# EAGLE board 001 (EAGLE 9.6.2)

Size 100 x 80 mm. Coordinates in mm from the lower left corner, seen from the top.
Outline: 0,0 100,0 100,80 0,80 0,0
Copper layers (1*16): Top 0.035mm / dielectric 1.5mm / Bottom 0.035mm
Design rules "default": minimum track width 6mil, minimum drill 0.35mm, track to track 6mil, track to pad 6mil, pad to pad 6mil, via to via 6mil, smd to smd 6mil, copper to edge 40mil, drill to drill 6mil, minimum pad ring 10mil, minimum via ring 8mil, stop-mask expansion 4mil, vias tented up to drill 0mil, thermal gap 10mil

## Footprints (pad centres in the part's own frame; a part is rotated, then mirrored left to right if it is on the bottom)
E7,5-16 = drill 1.016 pad 3.15: + -3.81,0 | drill 1.016 pad 3.15 octagon: - 3.81,0
DO-41 = drill 1: A 4.325,0 | drill 1 square: C -4.325,0
0207/5V = drill 0.813 octagon: 1 -2.54,0; 2 2.54,0
B02B-XH = drill 0.8 square: P$1 -2.54,0 | drill 0.8: P$2 0,0
08-043X78_VARI = drill 1.016 octagon: 1 -3.81,0; 2 3.81,0
05-043X78 = drill 1.016 octagon: 1 -2.54,0; 2 2.54,0
JQC-3FF = drill 1.3 pad 2.54: P$1 15.6,14; P$2 15.6,2; P$3 3.4,14; P$4 3.4,2; P$5 1.4,8
TOSHIBA_TLP222A_F_0 = drill 0.85 pad 1.35 square: 1 -3.81,1.27 | drill 0.85 pad 1.35: 2 -3.81,-1.27; 3 3.81,-1.27; 4 3.81,1.27
0446200002 = drill 0.889 pad 1.422: 1 3.556,2.54; 2 2.54,4.318; 3 1.524,2.54; 4 0.508,4.318; 5 -0.508,2.54; 6 -1.524,4.318; 7 -2.54,2.54; 8 -3.556,4.318 | drill 1.575 pad 2.286: S@1 -8.103,3.429; S@2 8.103,3.429 | hole 3.251: 6.35,0; -6.35,0

## Placement (x,y rotation side)
C1  35V/2200uF  [E7,5-16]  -95.25,-31.75 0 top  (outside the outline)
D1  1N4007  [DO-41]  -97.79,-44.45 0 top  (outside the outline)
R1  4.7k  [0207/5V]  -109.22,-50.8 0 top  (outside the outline)
U$1  02-JST-A  [B02B-XH]  33.02,38.1 270 top
U$2  02-JST-A  [B02B-XH]  -48.26,5.08 0 top  (outside the outline)
U$3  02-JST-A  [B02B-XH]  -58.42,5.08 0 top  (outside the outline)
U$4  TNR10V471K  [08-043X78_VARI]  -55.88,-5.08 0 top  (outside the outline)
U$5  LVR040  [05-043X78]  11.43,27.94 180 top
U$6  TNR10V471K  [08-043X78_VARI]  22.86,27.94 0 top
U$7  LVR040  [05-043X78]  -55.88,-12.7 0 top  (outside the outline)
U$8  [JQC-3FF]  7.62,31.75 0 top
U$9  [JQC-3FF]  -102.87,-11.43 0 top  (outside the outline)
U$10  [TOSHIBA_TLP222A_F_0]  -97.79,-20.32 0 top  (outside the outline)
U$11  02-JST-A  [B02B-XH]  -109.22,-43.18 0 top  (outside the outline)
X1  0446200002  [0446200002]  10.16,15.24 90 top
X2  0446200002  [0446200002]  40.64,15.24 90 top
X3  0446200002  [0446200002]  -22.86,40.64 0 top  (outside the outline)
X4  0446200002  [0446200002]  -22.86,58.42 0 top  (outside the outline)

## Library data of the parts
C1 = rcl; SPICEPREFIX: C
D1 = Diodes; CREATED_BY: PCBLayout.com; DIGIKEY_PART_NUMBER: 1N4007MSCT-ND; MANUFACTURER: Micro Commercial Co; MPN: 1N4007; PACKAGE: DO-41
R1 = rcl; SPICEPREFIX: R
U$1-U$9 U$11 = holly
U$10 = Toshiba-TLP222AF
X1-X4 = con-molex; MF: MOLEX; MPN: 0446200002; OC_FARNELL: 9251910

## Nets
GND: X2.S@1 X2.S@2
N$1: U$5.2 U$8.P$5
N$2: U$5.1 U$6.1 X1.4 X1.5
N$3: U$1.P$2 U$6.2 X1.7 X1.8
N$4: X1.S@1 X1.S@2
N$5: U$9.P$3 U$10.3
N$6: U$3.P$2 U$4.1 U$9.P$4 X3.7 X3.8
N$7: X3.S@1 X3.S@2 X4.S@1 X4.S@2
N$8: U$7.1 U$9.P$5
N$9: U$1.P$1 U$8.P$1
N$10: U$3.P$1 U$9.P$1
N$11: U$8.P$3 U$8.P$4
N$12: R1.1 U$10.1
N$13: C1.+ D1.C R1.2
N$14: D1.A U$11.P$1
N$15: C1.- U$10.2 U$11.P$2
PD1: X3.1 X4.1
PD2: X3.2 X4.2
PD3: X3.3 X4.3
PD4: X3.6 X4.6
PSEBUS1: X1.1 X2.1
PSEBUS2: X1.2 X2.2
PSEBUS3: X1.3 X2.3
PSEBUS4: X1.6 X2.6
VCC_PD: U$4.2 U$7.2 U$10.4 X3.4 X3.5

## Tracks (layer width: path | path; a pad name or v marks a point on that pad's centre or on a via)
GND  (1 unrouted)
N$1  (1 unrouted)
N$2  (3 unrouted)
N$3  (3 unrouted)
N$4  (1 unrouted)
N$5  (1 unrouted)
N$6  (4 unrouted)
N$7  (3 unrouted)
N$8  (1 unrouted)
N$9  (1 unrouted)
N$10  (1 unrouted)
N$11  (1 unrouted)
N$12  (1 unrouted)
N$13  (2 unrouted)
N$14  (1 unrouted)
N$15  (2 unrouted)
PD1  (1 unrouted)
PD2  (1 unrouted)
PD3  (1 unrouted)
PD4  (1 unrouted)
PSEBUS1  (1 unrouted)
PSEBUS2  (1 unrouted)
PSEBUS3  (1 unrouted)
PSEBUS4  (1 unrouted)
VCC_PD  (4 unrouted)